# Altium PCB PCB1.PcbDoc (part 1 of 2)
Units mil, origin at the board's own origin, x right, y up, seen from the top; angles counter-clockwise.
Board outline 2521.04 x 1050 mil, 4 copper layers (Layer 1, Layer 2, Layer 3, Layer 4), stack 61.583 mil thick; 66 components, 75 nets, 299 pads, 167 vias.
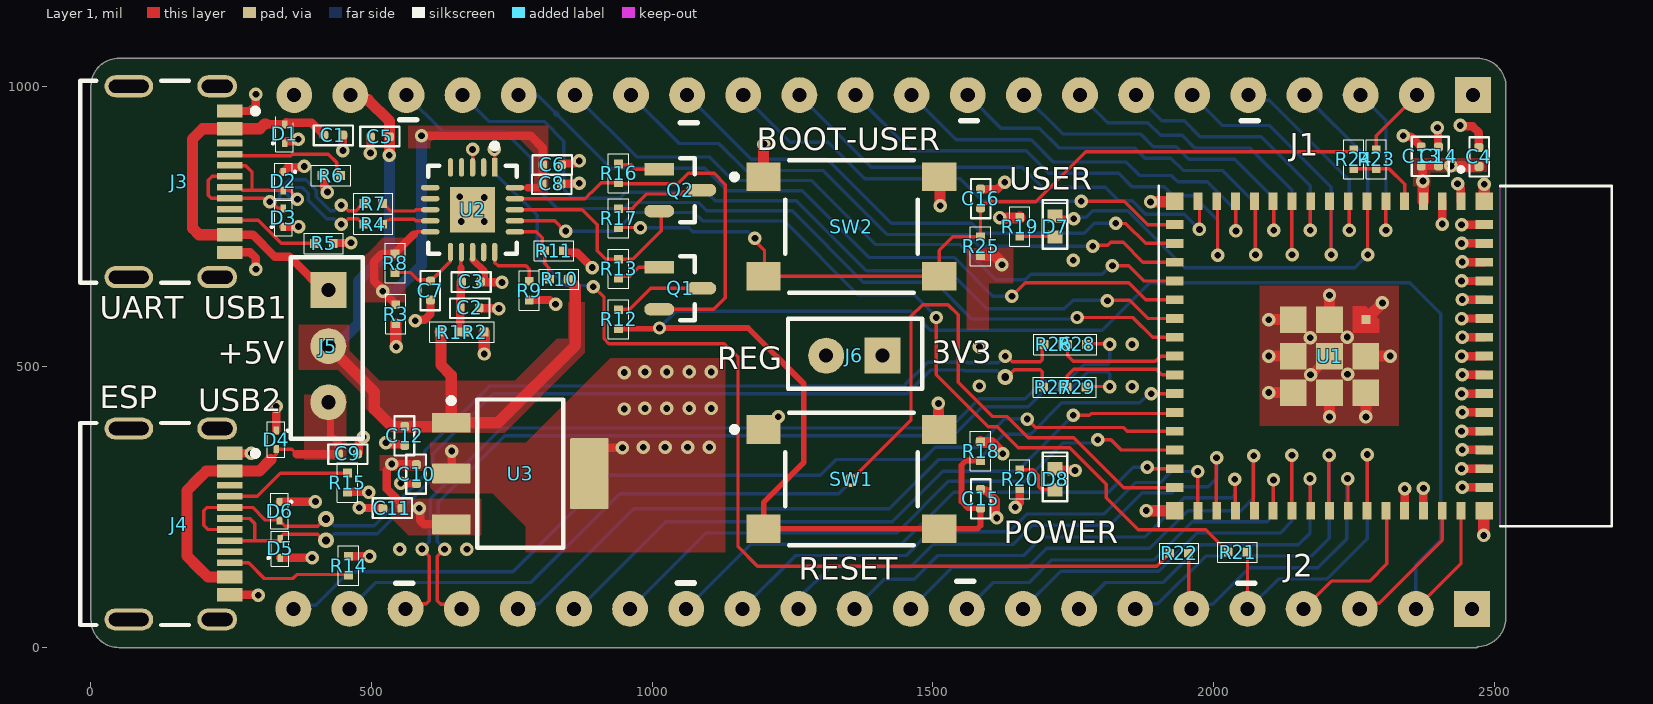
[diagram p0: Layer 1 view]
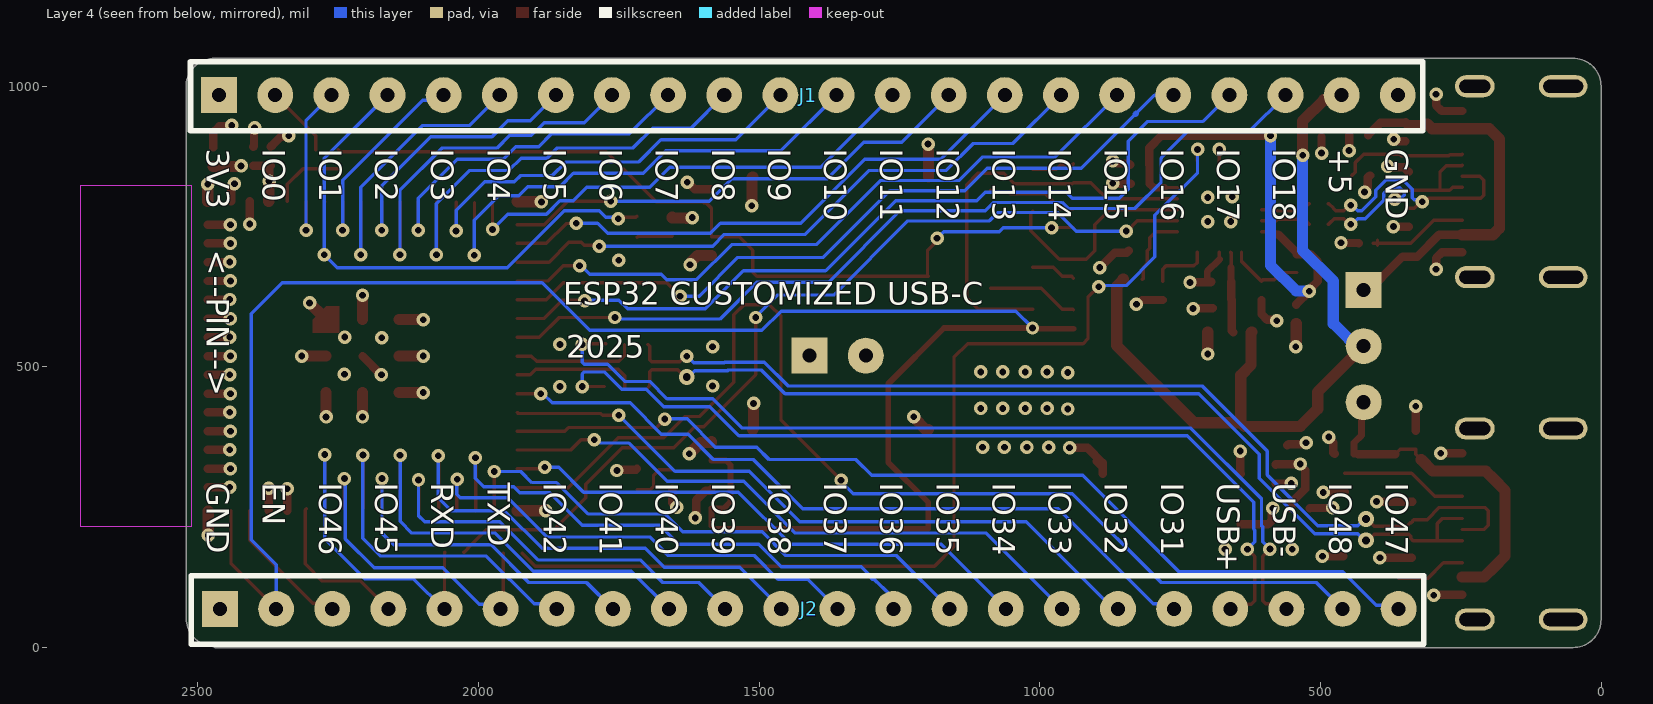
[diagram p1: Layer 4 view, seen from below]
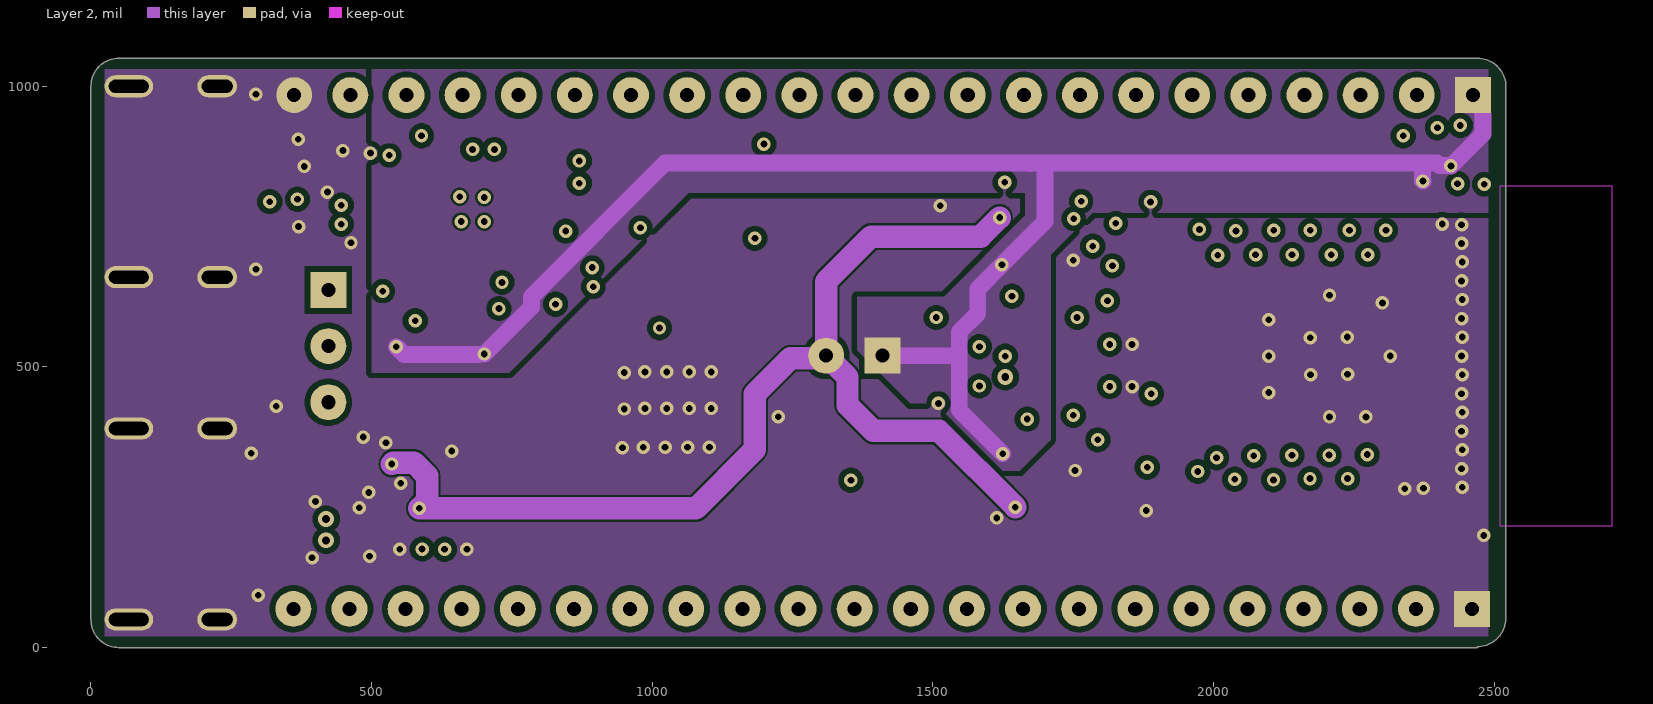
[diagram p2: Layer 2]
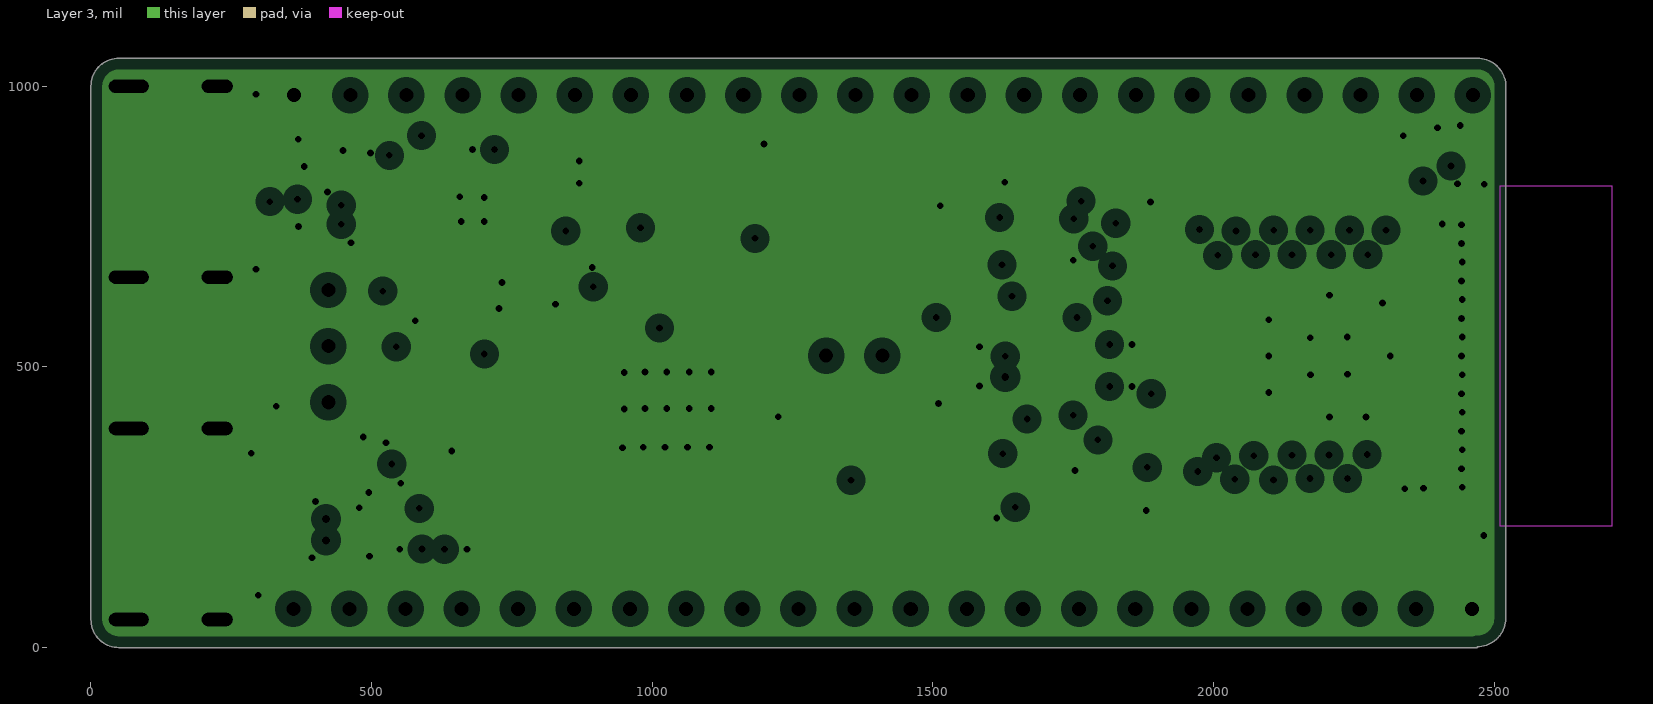
[diagram p3: Layer 3, clearances drawn from the general rule]

## Layer stack, top to bottom
Top Solder: solder mask 0.4, Solder Resist, Dk 3.5
Layer 1: signal copper 1.378
Dielectric 2: prepreg 3.9134, PP-006, Dk 4.1
Layer 2: signal copper 0.5984
Dielectric 1: dielectric 49.8031, FR-4, Dk 4.8
Layer 3: plane copper 0.5984, net GND
Dielectric 3: prepreg 3.9134, PP-006, Dk 4.1
Layer 4: signal copper 1.378
Bottom Solder: solder mask 0.4, Solder Resist, Dk 3.5

## Board outline
50,0 cw(c50,50) 0,50 0,1000 cw(c50,1000) 50,1050 2470.1,1050 cw(c2470.1,999.06) 2521.04,999.06 2521.04,52.18 2520.55,52.18 cw(c2469.61,52.18) 2469.61,1.24 2469.61,0

## Design rules (kind name [scope] priority, off if disabled: settings)
Clearance SMALLER [WithinRoom('FTDI') or WithinRoom('USBC1') or WithinRoom('USBC2')] p1: gap=4 ignorepadtopadclearanceinfootprint=FALSE
Clearance [All] p2: gap=10 ignorepadtopadclearanceinfootprint=FALSE except(0: Text-Text; 4: Track-Poly SMDPad-Poly; 5: Arc-Via Track-Via; 6: SMDPad-SMDPad; 8: Arc-Arc Arc-Track Track-Track)
ComponentClearance R27-R29 [InComponent('R29') vs InComponent('R27')] p1: gap=0 collisioncheckmode=3 verticalgap=0 showdistances=FALSE
ComponentClearance R26-R28 [InComponent('R28') vs InComponent('R26')] p2: gap=0 collisioncheckmode=3 verticalgap=0 showdistances=FALSE
ComponentClearance R1-R2 [InComponent('R1') vs InComponent('R2')] p3: gap=0 collisioncheckmode=3 verticalgap=0 showdistances=FALSE
ComponentClearance ComponentClearance_1 [All] p4: gap=10 collisioncheckmode=3 verticalgap=10 showdistances=FALSE
DiffPairsRouting DIFF90 [InDifferentialPairClass('DIFF90')] p1: maxlimit=8.1 minlimit=8 mostfreqgap=8 toplayer_minwidth=6.03 toplayer_maxwidth=6.23 toplayer_prefwidth=6.03 midlayer1_minwidth=5.11 midlayer1_maxwidth=5.31 midlayer1_prefwidth=5.11 bottomlayer_minwidth=6.03 bottomlayer_maxwidth=6.23 bottomlayer_prefwidth=6.03 maxuncoupledlength=500
DiffPairsRouting [All] p2: maxlimit=10 minlimit=10 mostfreqgap=10 toplayer_minwidth=15 toplayer_maxwidth=15 toplayer_prefwidth=15 midlayer1_minwidth=15 midlayer1_maxwidth=15 midlayer1_prefwidth=15 bottomlayer_minwidth=15 bottomlayer_maxwidth=15 bottomlayer_prefwidth=15 maxuncoupledlength=500
MinimumSolderMaskSliver [All] p1: minsoldermaskwidth=4
PlaneClearance [All] p1: clearance=20
PlaneConnect [All] p1: pad.planeconnectstyle=Relief pad.reliefexpansion=20 pad.reliefentries=4 pad.reliefconductorwidth=20 pad.reliefairgap=10 via.planeconnectstyle=Direct via.reliefexpansion=20 via.reliefentries=4 via.reliefconductorwidth=10 via.reliefairgap=10
PolygonConnect [All] p1: connectstyle=Direct reliefconductorwidth=10 reliefentries=4 polygonreliefangle="90 Angle" airgapwidth=10
RoomDefinition RANDOM [False vs False] p1: confinementstyle=ConfineIn formatcopy=TRUE lockcomponents=FALSE outline 546,815 465,815 465,735 546,735
RoomDefinition FTDI [False vs False] p2: confinementstyle=ConfineIn formatcopy=TRUE lockcomponents=FALSE outline 575,885 778.07,885 778.07,677.07 575,677.07
RoomDefinition USBC1 [False vs False] p3: confinementstyle=ConfineIn formatcopy=TRUE lockcomponents=FALSE outline 146,1026 312,1026 312,635 146,635
RoomDefinition USBC2 [False vs False] p4: confinementstyle=ConfineIn formatcopy=TRUE lockcomponents=FALSE outline 154.36,416.24 320.36,416.24 320.36,25.24 154.36,25.24
RoutingVias [All] p1: holewidth=14 width=28 viastyle="Through Hole" minholewidth=6 minwidth=10 maxholewidth=28 maxwidth=50
SilkToSolderMaskClearance [IsPad] p1: minsilkscreentomaskgap=6 clearancetoexposedcopper=TRUE
SolderMaskExpansion [All] p1: expansion=4 istentingtop=FALSE
SupplyNets "Schematic Supply Nets_5" [InNet('+3V3')] p1: voltage=0.000
SupplyNets "Schematic Supply Nets_4" [InNet('+3V3_REG')] p2: voltage=0.000
SupplyNets "Schematic Supply Nets_3" [InNet('+5V BUS2')] p3: voltage=0.000
SupplyNets "Schematic Supply Nets_2" [InNet('GND')] p4: voltage=0.000
SupplyNets "Schematic Supply Nets_1" [InNet('+5V')] p5: voltage=0.000
SupplyNets "Schematic Supply Nets" [InNet('+5V BUS1')] p6: voltage=0.000
UnRoutedNet [WithinRoom('RANDOM')] p1:
Width [All] p1: maxlimit=100 minlimit=6 preferedwidth=10 midlayer1_minwidth=10 minimp=50.000000 maximp=50.000000 favimp=50.000000
23 further rules are at their usual default settings.

## Classes and differential pairs
differential pair class DIFF90: CON1_USB CON2_USB CON_ESP_USB ESP_USB FTDI1_USB
differential pair FTDI1_USB: +FTDI1_USB_P -FTDI1_USB_N
differential pair ESP_USB: +ESP_USB_P -ESP_USB_N
differential pair CON_ESP_USB: +CON_ESP_USB_P -CON_ESP_USB_N
differential pair CON2_USB: +CON2_USB_P -CON2_USB_N
differential pair CON1_USB: +CON1_USB_P -CON1_USB_N

## Components (designator, comment, footprint, x,y, rotation, side; value= is the part's Value field where it differs from the comment)
C1 "0.1uF, 50V" FP-CL599-IPC_B 432,913 r180 top value=100nF
C2 "0.1uF, 50V" FP-CL599-IPC_B 675,605 r180 top value=100nF
C3 "4u7F" FP-CL599-IPC_B 677.42,651.53 r180 top value=4.7uF
C4 "0.1uF, 50V" FP-CL599-IPC_B 2473,874 r270 top value=100nF
C5 "0.1uF, 50V" FP-CL599-IPC_B 515,910 r0 top value=100nF
C6 "0.1uF, 50V" FP-CL599-IPC_B 822,860 r180 top value=100nF
C7 "0.1uF, 50V" FP-CL599-IPC_B 605,636 r90 top value=100nF
C8 "0.1uF, 50V" FP-CL599-IPC_B 821,826 r180 top value=100nF
C9 "0.1uF, 50V" FP-CL599-IPC_B 458,345 r180 top value=100nF
C10 "10uF, 10V" FP-CL599-IPC_B 580,309 r90 top value=10uF
C11 "10uF, 10V" FP-CL599-IPC_B 537,248 r0 top value=10uF
C12 "4u7F" FP-CL599-IPC_B 559,377 r90 top value=4.7uF
C13 "10uF, 10V" FP-CL599-IPC_B 2370.16,875 r270 top value=10uF
C14 "0.1uF, 50V" FP-CL599-IPC_B 2401,875 r270 top value=100nF
C15 "1uF, 16V" FP-CL599-IPC_B 1585,265 r270 top value=1uF
C16 "0.1uF, 50V" FP-CL599-IPC_B 1585,800 r270 top value=100nF
D1 "ESD9B5.0ST5G" ONSC-SOD-923-2-514AB-01_V 345,915 r90 top value=15pF
D2 "ESD9B5.0ST5G" ONSC-SOD-923-2-514AB-01_V 343,831 r270 top value=15pF
D3 "ESD9B5.0ST5G" ONSC-SOD-923-2-514AB-01_V 343,766 r90 top value=15pF
D4 "ESD9B5.0ST5G" ONSC-SOD-923-2-514AB-01_V 330,370 r270 top value=15pF
D5 "ESD9B5.0ST5G" ONSC-SOD-923-2-514AB-01_V 337,176.46 r90 top value=15pF
D6 "ESD9B5.0ST5G" ONSC-SOD-923-2-514AB-01_V 336,243 r270 top value=15pF
D7 "RED" LED-RED-0402 1717.67,750 r90 top
D8 "GREEN" LED-GREEN-0402 1717.67,300 r90 top
J1 "TS-122-G-A" HDR_1X22_2.54MM 2462.2,984.25 r90 bottom locked
J2 "TS-122-G-A" HDR_1X22_2.54MM 2460.63,68.9 r90 bottom locked
J3 "USB-C" FP-2171790001-MFG 112.8,829.92 r270 top locked
J4 "USB-C" FP-2171790001-MFG 112.8,220.08 r270 top locked
J5 "TS-103-T-A" HDR_1X3_2.54MM -312,179 r0 top locked
J6 "TS-102-T-A" HDR_1X2_2.54MM -676,-21721 r270 top locked
Q1 "SS8050-G" FP-SS8050-G-IPC_B 1050,640 r0 top
Q2 "SS8050-G" FP-SS8050-G-IPC_B 1050,815 r0 top
R1 "0R" RESC1005X40X25NL05T10 638.73,562 r0 top
R2 "0R" RESC1005X40X25NL05T10 684,562 r180 top
R3 "0R" RESC1005X40X25NL05T10 543,594 r90 top
R4 "27R" RESC1005X40X25NL05T10 503,754 r0 top
R5 "5k1R" RESC1005X40X25NL05T10 415,720 r180 top value=5.1kR
R6 "5k1R" RESC1005X40X25NL05T10 428,841 r0 top value=5.1kR
R7 "27R" RESC1005X40X25NL05T10 503,791 r0 top
R8 "0R" RESC1005X40X25NL05T10 542,685 r270 top
R9 "10k, (1%)" RESC1005X40X25NL05T10 781,636 r270 top value=10kR
R10 "4k7R" RESC1005X40X25NL05T10 834,656 r0 top value=4.7kR
R11 "10k, (1%)" RESC1005X40X25NL05T10 825,707 r180 top value=10kR
R12 "0R" RESC1005X40X25NL05T10 940,585 r270 top
R13 "10k, (1%)" RESC1005X40X25NL05T10 940,675 r270 top value=10kR
R14 "5k1R" RESC1005X40X25NL05T10 459,146 r270 top value=5.1kR
R15 "5k1R" RESC1005X40X25NL05T10 457,294 r90 top value=5.1kR
R16 "10k, (1%)" RESC1005X40X25NL05T10 940,845 r90 top value=10kR
R17 "0R" RESC1005X40X25NL05T10 940,765 r270 top
R18 "10k, (1%)" RESC1005X40X25NL05T10 1585,350 r90 top value=10kR
R19 "1kR" RESC1005X40X25NL05T10 1655,750 r90 top
R20 "1kR" RESC1005X40X25NL05T10 1655,300 r270 top
R21 "0R" RESC1005X40X25NL05T10 2043,170 r180 top
R22 "0R" RESC1005X40X25NL05T10 1939,168 r180 top
R23 "27R" RESC1005X40X25NL05T10 2290,870 r270 top
R24 "27R" RESC1005X40X25NL05T10 2250,870 r270 top
R25 "10k, (1%)" RESC1005X40X25NL05T10 1585,715 r270 top value=10kR
R26 "0R" RESC1005X40X25NL05T10 1715,540 r0 top
R27 "0R" RESC1005X40X25NL05T10 1714,464 r0 top
R28 "0R" RESC1005X40X25NL05T10 1756.73,540 r180 top
R29 "0R" RESC1005X40X25NL05T10 1756.2,464 r180 top
SW1 "Push  button SPST" FP-PTS645SH50SMTR92LFS-MFG 1355,300 r0 top locked
SW2 "Push  button SPST" FP-PTS645SH50SMTR92LFS-MFG 1355,750 r0 top locked
U1 "ESP32-S3-MINI-1-N8" XCVR_ESP32-S3-MINI-1-N8 2206.73,519.26 r270 top locked
U2 "USB to UART Bridge" FP-QFN-20-IPC_B 680,780 r270 top locked
U3 "LDO 3V3" DCY0004A_N 765,310 r0 top locked

## Footprints (in the part's own frame and the unit in brackets; to place one, negate y for a bottom-side part, rotate by r counter-clockwise, add the part's x,y. Pads: shape width x height; smd on the part's side, far side on the other; paste and mask are expansions set on the pad)
DCY0004A_N [mm] "SOT223, 4-Leads, Body 6.7x3.7mm, Pitch 2.3mm, IPC Medium Density"
  rrect11% 1.75x0.9 smd: 1(-3.125,2.3) 2(-3.125,0) 3(-3.125,-2.3)
  rrect6% 1.75x3.2 smd: 4(3.125,0)
  silkscreen extent -3.25,-3.35 1.95,3.42, body extent -3.5,-3.25 3.5,3.25, height 1.62
FP-2171790001-MFG [mm]
  rect 0.6x1.15 smd paste+0 mask+0: A1B12(-3.2,3.425) A4B9(-2.4,3.425) B1A12(3.2,3.425) B4A9(2.4,3.425)
  rect 0.3x1.15 smd paste+0 mask+0: A5(-1.25,3.425) A6(-0.25,3.425) A7(0.25,3.425) A8(1.25,3.425) B5(1.75,3.425) B6(0.75,3.425) B7(-0.75,3.425) B8(-1.75,3.425)
  rrect100% 1x1.8 hole 1.4 slot 0.6 at 0 deg paste-2539.97 mask+0: S1(-4.32,2.85) S2(4.32,2.85)
  rrect100% 1x2.2 hole 1.8 slot 0.6 at 0 deg paste-2539.97 mask+0: S3(-4.32,-1.15) S4(4.32,-1.15)
  silkscreen extent -4.57,-3.35 4.57,4.7, body extent -4.92,-3.45 4.92,4.1, height 0.25
FP-CL599-IPC_B [mil]
  rrect50% 15.69x15.69 smd paste+0 mask+0: 1(-16.87,0) 2(16.87,0)
  silkscreen extent -35,-17 35,18, body extent -35,-17 35,17, height 10
FP-PTS645SH50SMTR92LFS-MFG [mm]
  rect 1.55x1.3 smd paste+0 mask+0: 1(-3.975,2.25) 2(3.975,2.25) 3(-3.975,-2.25) 4(3.975,-2.25)
  silkscreen extent -5.42,-3 3,3, body extent -4.5,-3 4.5,3, height 4.3
FP-QFN-20-IPC_B [mm]
  rect 0.84x0.242 smd paste+0 mask+0: 1(-1.916,1)
  rrect100% 0.84x0.242 smd paste+0 mask+0: 2(-1.916,0.5) 3(-1.916,0) 4(-1.916,-0.5) 5(-1.916,-1) 11(1.916,-1) 12(1.916,-0.5) 13(1.916,0) 14(1.916,0.5) 15(1.916,1)
  rrect100% 0.242x0.84 smd paste+0 mask+0: 6(-1,-1.916) 7(-0.5,-1.916) 8(0,-1.916) 9(0.5,-1.916) 10(1,-1.916) 16(1,1.916) 17(0.5,1.916) 18(0,1.916) 19(-0.5,1.916) 20(-1,1.916)
  rect 2.05x2.05 smd paste-1000 mask+0: 21(0,0)
  silkscreen extent -3.01,-2 2,2, body extent -2.59,-2.59 2.59,2.59, height 0.25
FP-SS8050-G-IPC_B [mm]
  rect 1.357x0.572 smd paste+0 mask+0: 1(-0.951,0.95)
  rrect100% 1.357x0.572 smd paste+0 mask+0: 2(-0.951,-0.95) 3(0.951,0)
  silkscreen extent 0,-1.45 0.65,1.45, body extent -1.88,-1.7 1.88,1.7, height 0.25
HDR_1X2_2.54MM [mil]
  rect 64x64 hole 25: 1(-22241,2086)
  round 64 hole 25: 2(-22241,1986)
  silkscreen extent -22307,1918 -22182,2157, body extent -22292,1933 -22192,2141, height 326
HDR_1X3_2.54MM [mil]
  rect 64x64 hole 25: 1(735,458)
  round 64 hole 25: 2(735,358) 3(735,258)
  silkscreen extent 668,193 796,516, body extent 685,204 785,512, height 326
HDR_1X22_2.54MM [mil]
  rect 64x64 hole 25: 1(0,0)
  round 64 hole 25: 2(0,-100) 3(0,-200) 4(0,-300) 5(0,-400) 6(0,-500) 7(0,-600) 8(0,-700) 9(0,-800) 10(0,-900) 11(0,-1000) 12(0,-1100) 13(0,-1200) 14(0,-1300) 15(0,-1400) 16(0,-1500) 17(0,-1600) 18(0,-1700) 19(0,-1800) 20(0,-1900) 21(0,-2000) 22(0,-2100)
  silkscreen extent -63,-2145 59,51, body extent -51,-2151 49,57, height 326
LED-GREEN-0402 [mm]
  rect 0.6x0.7 smd: 1(-0.475,0) 2(0.475,0)
  silkscreen extent -1,-0.56 1.2,0.56, body extent -0.5,-0.3 0.5,0.3, height 0.2
LED-RED-0402 [mm]
  rect 0.6x0.7 smd: 1(-0.475,0) 2(0.475,0)
  silkscreen extent -1,-0.56 1.2,0.56, body extent -0.5,-0.3 0.5,0.3, height 0.2
ONSC-SOD-923-2-514AB-01_V [mm] "SOD, 2-Leads, Body 0.8x0.6mm"
  rect 0.36x0.25 smd: 1(-0.42,0) 2(0.42,0)
  silkscreen extent -0.81,-0.4 0.79,0.57, body extent -0.4,-0.3 0.4,0.3, height 0.4
RESC1005X40X25NL05T10 [mm] "Chip Resistor, 2-Leads, Body 1.00x0.50mm, IPC Medium Density"
  rect 0.397x0.398 smd mask+0.05: 1(-0.425,0) 2(0.425,0)
  silkscreen extent -0.89,-0.46 0.89,0.46, body extent -0.53,-0.27 0.53,0.28, height 0.4
XCVR_ESP32-S3-MINI-1-N8 [mm]
  rect 0.8x0.4 smd: 1(-7,5.95) 2(-7,5.1) 3(-7,4.25) 4(-7,3.4) 5(-7,2.55) 6(-7,1.7) 7(-7,0.85) 8(-7,0) 9(-7,-0.85) 10(-7,-1.7) 11(-7,-2.55) 12(-7,-3.4) 13(-7,-4.25) 14(-7,-5.1) 15(-7,-5.95) 31(7,-5.95) 32(7,-5.1) 33(7,-4.25) 34(7,-3.4) 35(7,-2.55) 36(7,-1.7) 37(7,-0.85) 38(7,0) 39(7,0.85) 40(7,1.7) 41(7,2.55) 42(7,3.4) 43(7,4.25) 44(7,5.1) 45(7,5.95)
  rect 0.4x0.8 smd: 16(-5.95,-7) 17(-5.1,-7) 18(-4.25,-7) 19(-3.4,-7) 20(-2.55,-7) 21(-1.7,-7) 22(-0.85,-7) 23(0,-7) 24(0.85,-7) 25(1.7,-7) 26(2.55,-7) 27(3.4,-7) 28(4.25,-7) 29(5.1,-7) 30(5.95,-7) 46(5.95,7) 47(5.1,7) 48(4.25,7) 49(3.4,7) 50(2.55,7) 51(1.7,7) 52(0.85,7) 53(0,7) 54(-0.85,7) 55(-1.7,7) 56(-2.55,7) 57(-3.4,7) 58(-4.25,7) 59(-5.1,7) 60(-5.95,7)
  rect 1.2x1.2 smd: 61(0,0) 67(0,1.65) 68(1.65,1.65) 69(-1.65,0) 70(1.65,0) 71(-1.65,-1.65) 72(0,-1.65) 73(1.65,-1.65)
  rect 0.8x0.8 smd: 62(-7,7) 63(-7,-7) 64(7,-7) 65(7,7)
  rect 0.4x0.4 smd paste-1 mask+0: 66(-1.65,1.65)
  Layer 1 region: -1.05,1.05 -2.25,1.05 -2.25,1.65 -1.65,2.25 -1.05,2.25
  Keep-Out Layer region: 7.7,7.725 -7.7,7.725 -7.7,12.775 7.7,12.775
  Keep-Out Layer region: 7.7,7.725 -7.7,7.725 -7.7,12.775 7.7,12.775
  silkscreen extent -8.55,-7.73 7.7,12.78, body extent -7.7,-7.73 7.7,12.78, height 2.55

## Part data
C1 C2 C4 C5 C6 C7 C8 C9 C14 C16: library part CL05B104KB54PNC, "50V 100nF X7R ±10% 0402 Multilayer Ceramic Capacitors MLCC - SMD/SMT ROHS", Case/Package=343Case, LCSC part number=C307331, Manufacturer=Samsung, Max Operating Temperature=125°C, Min Operating Temperature=-55°C, Supplier Part Number=1276-CL05B104KB54PNCCT-ND, Tolerance=10%, Voltage Rating=50V, Category="Ceramic Capacitors", Height=550um, Manufacturer Part Number=CL05B104KB54PNC, Material=4241ConductorMaterial, Pricing="1=0.1, 10=0.03, 100=0.018, 1000=0.01195, 2500=0.01037, 5000=0.00939 (USD)", RoHS=Yes, RoHS Compliant=Yes, Stock=1445745, Supplier=Digikey
C3 C12: library part CL05A475MP5NRNC, "Multilayer Ceramic Capacitor, 4.7 uF, 10 V, ï¿½ 20%, X5R, 0402 [1005 Metric]", Case Code (Imperial)=0402, Case Code (Metric)=1005, Dielectric=X5R, LCSC part number=C23733, Manufacturer=Samsung, Max Operating Temperature=85°C, Min Operating Temperature=-55°C, Supplier Part Number=1276-1482-1-ND, Tolerance=20%, Voltage Rating=10V, Case/Package=0402, Category="Ceramic Capacitors", ComponentLink1Description=https://datasheet.ciiva.com/25786/cl05a475mp5nrnc-25786963.pdf?src-supplier=Digikey, ComponentLink1URL=https://datasheet.ciiva.com/25786/cl05a475mp5nrnc-25786963.pdf?src-supplier=Digikey, ComponentLink2Description=https://datasheet.ciiva.com/16437/cl05b104kq5nnnc-16437353.pdf?src-supplier=Future+Electronics, ComponentLink2URL=https://datasheet.ciiva.com/16437/cl05b104kq5nnnc-16437353.pdf?src-supplier=Future+Electronics, Height=550um, Lead Free="Lead Free", Manufacturer Part Number=CL05A475MP5NRNC, Material=4241ConductorMaterial, Mounting Technology="Surface Mount", Packaging="Cut Tape", Pricing="1=0.1, 10=0.04, 100=0.0245, 1000=0.01648, 2500=0.01439, 5000=0.01308 (USD)", RoHS=Yes, RoHS Compliant=Yes, Series=CL, Stock=1513638, Supplier=Digikey
C10 C11 C13: library part CL05A106MP8NUB8, "Multilayer Ceramic Capacitor, 10 uF, 10 V, ± 20%, X5R, 0402 [1005 Metric]", Case Code (Imperial)=0402, Case Code (Metric)=1005, Manufacturer=Samsung, Max Operating Temperature=85°C, Min Operating Temperature=-55°C, Supplier Part Number=1276-6830-1-ND, Tolerance=20%, Voltage Rating=10V, Case/Package=0402, Category="Ceramic Capacitors", ComponentLink1Description=http://www.samsungsem.com/kr/support/product-search/mlcc/CL05A106MP8NUB8.jsp?src-supplier=Digikey, ComponentLink1URL=http://www.samsungsem.com/kr/support/product-search/mlcc/CL05A106MP8NUB8.jsp?src-supplier=Digikey, ComponentLink2Description=https://datasheet.octopart.com/CL05A106MP8NUB8-Samsung-Electro-Mechanics-datasheet-136460857.pdf?src-supplier=Future+Electronics, ComponentLink2URL=https://datasheet.octopart.com/CL05A106MP8NUB8-Samsung-Electro-Mechanics-datasheet-136460857.pdf?src-supplier=Future+Electronics, Height=550um, LCSC part number=CL05A106MP8NUB8, Length=0.039inch, Manufacturer Part Number=CL05A106MP8NUB8, Material=4241ConductorMaterial, Mounting Technology="Surface Mount", Packaging="Cut Tape", Pricing="1=0.31, 10=0.188, 100=0.1251, 1000=0.09037, 2500=0.08106 (USD)", RoHS=Yes, RoHS Compliant=Yes, Series=CL, Stock=179131, Supplier=Digikey, Thickness=0.035inch, Width=0.02inch
C15: library part CL05A105KO5NNNC, "16V 1uF X5R ±10% 0402 Multilayer Ceramic Capacitors MLCC - SMD/SMT ROHS", Case Code (Imperial)=0402, Case Code (Metric)=1005, Dielectric=X5R, LCSC part number=C29266, Manufacturer=Samsung, Max Operating Temperature=85°C, Min Operating Temperature=-55°C, Package Quantity=1, Supplier Part Number=1276-1067-1-ND, Tolerance=10%, Voltage=16V, Case/Package=0402, Category="Ceramic Capacitors", ComponentLink1Description=https://datasheet.ciiva.com/16207/cl05a105ko5nnnc-16207571.pdf?src-supplier=Future+Electronics, ComponentLink1URL=https://datasheet.ciiva.com/16207/cl05a105ko5nnnc-16207571.pdf?src-supplier=Future+Electronics, ComponentLink2Description=https://datasheet.ciiva.com/15195/getdatasheetpartid-355272-15195629.pdf?src-supplier=Verical, ComponentLink2URL=https://datasheet.ciiva.com/15195/getdatasheetpartid-355272-15195629.pdf?src-supplier=Verical, Construction=Flat, Depth=0.5mm, Height=0.5mm, Length=1mm, Manufacturer Part Number=CL05A105KO5NNNC, Material=4241ConductorMaterial, Mounting Technology="Surface Mount", Packaging="Tape and Reel", Pricing="1=0.1, 10=0.027, 100=0.0163, 1000=0.01076, 2500=0.00932, 5000=0.00843 (USD)", Radiation Hardening=No, RoHS=Yes, RoHS Compliant=Yes, Series=CL, Stock=1549627, Supplier=Digikey, Thickness=0.022inch, Voltage Rating=16V, Voltage Rating (DC)=16V, Width=0.02inch
D1 D2 D3 D4 D5 D6: "ESD Suppressor TVS Single Bi-Dir ±18kV@Air Gap/±18kV@Contact Disc 2-Pin SOD-923 T/R", Breakdown Voltage=5.8V, Case/Package=SOD-923-2, Clamping Voltage=12.5V, LCSC part number=C316040, Leakage Current=1uA, Manufacturer="ON Semiconductor", Max Breakdown Voltage=7.8V, Max Operating Temperature=150°C, Max Power Dissipation=300mW, Max Surge Current=1A, Min Operating Temperature=-55°C, Operating Supply Voltage=5V, Package Quantity=1, Power Line Protection=No, Supplier Part Number=ESD9B5.0ST5GOSCT-ND, Test Current=1mA, Category="ESD and Circuit Protection ICs", Clamping Voltage-Max=12.5V, ComponentLink1Description=https://datasheet.ciiva.com/1219/1596367-1219274.pdf?src-supplier=Newark, ComponentLink1URL=https://datasheet.ciiva.com/1219/1596367-1219274.pdf?src-supplier=Newark, Depth=0.6mm, Diode Type=ZENER, Direction=Bidirectional, ESD Protection=Yes, Halogen Free="Halogen Free", Height=0.4mm, Lead Free="Lead Free", Length=0.8mm, Manufacturer Part Number=ESD9B5.0ST5G, Max Reverse Leakage Current=1uA, Min Breakdown Voltage=5.8V, Number of Bidirectional Channels=1, Number of Channels=1, Number of Elements=1, Number of Lines=1, Packaging="Tape and Reel", Peak Pulse Current=1A, Peak Pulse Power=300mW, Pins=2, Polarity=Bidirectional, Pricing="1=0.1, 10=0.071, 100=0.033, 500=0.031, 1000=0.029 (USD)", Radiation Hardening=No, Reach SVHC Compliant=No, Reverse Breakdown Voltage=5.8V, Reverse Standoff Voltage=5V, RoHS=Yes, RoHS Compliant=Yes, Series="Automotive, AEC-Q101", Stock=1217500, Supplier=Digikey, Termination=SMD/SMT, Width=0.65mm, Working Voltage=5V
D7: library part VLMS1500-GS08, "LED RED 0402 SMD", Case Code (Imperial)=0402, Case Code (Metric)=1005, Color=Red, Forward Current=30mA, Forward Voltage=2V, LCSC part number=C511370, Manufacturer=Vishay, Max Operating Temperature=85°C, Min Operating Temperature=-30°C, Package Quantity=9000, Power Rating=75mW, Supplier Part Number=VLMS1500-GS08CT-ND, Test Current=20mA, Case/Package=0402, Category=LEDs, ComponentLink1Description=http://components.arrow.com/part/dataview/56357384S461524N5680?src-supplier=Arrow+Electronics, ComponentLink1URL=http://components.arrow.com/part/dataview/56357384S461524N5680?src-supplier=Arrow+Electronics, ComponentLink2Description=http://www.mouser.com/ds/2/427/vlmo1500-244705.pdf?src-supplier=Mouser, ComponentLink2URL=http://www.mouser.com/ds/2/427/vlmo1500-244705.pdf?src-supplier=Mouser, ComponentLink3Description=http://www.farnell.com/datasheets/1809983.pdf?src-supplier=Farnell, ComponentLink3URL=http://www.farnell.com/datasheets/1809983.pdf?src-supplier=Farnell, ComponentLink4Description=http://www.alliedelec.com/m/d/cfc385e1097fc985ee9a50a3551ac188.pdf?src-supplier=Allied+Electronics, ComponentLink4URL=http://www.alliedelec.com/m/d/cfc385e1097fc985ee9a50a3551ac188.pdf?src-supplier=Allied+Electronics, ComponentLink5Description=https://datasheet.octopart.com/VLMS1500-GS08-Vishay-datasheet-62332426.pdf?src-supplier=Newark, ComponentLink5URL=https://datasheet.octopart.com/VLMS1500-GS08-Vishay-datasheet-62332426.pdf?src-supplier=Newark, ComponentLink6Description=http://www.vishay.com/docs/82554/vlmo1500.pdf?src-supplier=Avnet, ComponentLink6URL=http://www.vishay.com/docs/82554/vlmo1500.pdf?src-supplier=Avnet, ComponentLink7Description=https://datasheet.octopart.com/VLMS1500-GS08-Vishay-datasheet-21227148.pdf?src-supplier=Future+Electronics, ComponentLink7URL=https://datasheet.octopart.com/VLMS1500-GS08-Vishay-datasheet-21227148.pdf?src-supplier=Future+Electronics, ComponentLink8Description=http://www.farnell.com/datasheets/2050839.pdf?src-supplier=Newark, ComponentLink8URL=http://www.farnell.com/datasheets/2050839.pdf?src-supplier=Newark, ComponentLink9Description=http://www.farnell.com/datasheets/1809983.pdf?src-supplier=Element14, ComponentLink9URL=http://www.farnell.com/datasheets/1809983.pdf?src-supplier=Element14, ComponentLink10Description=https://datasheet.octopart.com/VLMS1500-GS08-Vishay-datasheet-33014519.pdf?src-supplier=Element14, ComponentLink10URL=https://datasheet.octopart.com/VLMS1500-GS08-Vishay-datasheet-33014519.pdf?src-supplier=Element14, ComponentLink11Description=http://www.farnell.com/datasheets/1809983.pdf?src-supplier=Newark, ComponentLink11URL=http://www.farnell.com/datasheets/1809983.pdf?src-supplier=Newark, ComponentLink12Description=http://datasheet.octopart.com/VLMS1500-GS08-Vishay-datasheet-21227148.pdf?src-supplier=Avnet, ComponentLink12URL=http://datasheet.octopart.com/VLMS1500-GS08-Vishay-datasheet-21227148.pdf?src-supplier=Avnet, ComponentLink13Description=http://datasheet.octopart.com/VLMS1500-GS08-Vishay-datasheet-21227148.pdf?src-supplier=LCSC, ComponentLink13URL=http://datasheet.octopart.com/VLMS1500-GS08-Vishay-datasheet-21227148.pdf?src-supplier=LCSC, ComponentLink14Description=http://datasheet.octopart.com/VLMS1500-GS08-Vishay-datasheet-21227148.pdf?src-supplier=Quest, ComponentLink14URL=http://datasheet.octopart.com/VLMS1500-GS08-Vishay-datasheet-21227148.pdf?src-supplier=Quest, ComponentLink15Description=http://datasheet.octopart.com/VLMS1500-GS08-Vishay-datasheet-21227148.pdf?src-supplier=NAC+Semi, ComponentLink15URL=http://datasheet.octopart.com/VLMS1500-GS08-Vishay-datasheet-21227148.pdf?src-supplier=NAC+Semi, Dominant Wavelength=631nm, Height=0.55mm, Illumination Color=Red, Lead Free="Lead Free", Length=1mm, Lens Size=0.5mm, Lens Style=Flat,Rectangular,Square, Luminous Intensity=54mcd, Manufacturer Part Number=VLMS1500-GS08, Mounting Technology="Surface Mount", Number of LEDs=1, Packaging="Tape and Reel", Pins=2, Pricing="1=0.33, 10=0.189, 100=0.1166, 500=0.08838, 1000=0.07977 (USD)", Radiation Hardening=No, Reach SVHC Compliant=Unknown, RoHS=Yes, RoHS Compliant=Yes, Series=CHipLED, Stock=72955, Supplier=Digikey, Viewing Angle=130°, Wavelength=631nm, Width=0.5mm
D8: library part VLMTG1500-GS08, "LED GREEN 0402 SMD", LCSC part number=C20346084, Manufacturer=Vishay, Supplier Part Number=751-VLMTG1500-GS08DKR-ND, Category=LEDs, Manufacturer Part Number=VLMTG1500-GS08, Pricing="1=0.43, 10=0.249, 100=0.1568, 500=0.12086, 1000=0.10985 (USD)", RoHS=Yes, RoHS Compliant=Yes, Stock=2572, Supplier=Digikey, Viewing Angle=65°
J1 J2: "22 Position Header Connector Post Gold", LCSC part number=C7125323, Manufacturer=Samtec, Supplier Part Number=200-TS122GA, Category=Connectors, ComponentLink1Description=https://datasheet.ciiva.com/410/tx-1xx-x-x-mkt1-410311.pdf?src-supplier=Digikey, ComponentLink1URL=https://datasheet.ciiva.com/410/tx-1xx-x-x-mkt1-410311.pdf?src-supplier=Digikey, Manufacturer Part Number=TS-122-G-A, Pricing="1=5.24, 10=5.24, 50=5.24, 100=4.19, 1000=3.03, 10000=2.45 (USD)", RoHS=Yes, Stock=20, Supplier=Mouser
J3 J4: library part 217179-0001, "CONN RCP USB2.0 TYP C 24P SMD RA", Current Rating=1.25A, LCSC part number=C2894899, Manufacturer=Molex, Max Operating Temperature=85°C, Min Operating Temperature=-40°C, Supplier Part Number=900-2171790001CT-ND, Voltage Rating=30V, Category=Connectors, Contact Material=Nickel,Gold, Gender=Receptacle, Height=3.36mm, Manufacturer Part Number=217179-0001, Number of Contacts=16, Pricing="1=0.79, 10=0.645, 25=0.5948, 50=0.5594, 100=0.5259, 250=0.48484, 500=0.45592 (USD)", RoHS=No, Stock=2736, Supplier=Digikey, USB Standard="USB 2.0"
J5: "CONN HEADER VERT 3POS 2.54MM", LCSC part number=C6338633, Manufacturer=Samtec, Supplier Part Number=SAM1112-03-ND, Category=Connectors, ComponentLink1Description=https://datasheet.ciiva.com/410/tx-1xx-x-x-mkt1-410199.pdf?src-supplier=Digikey, ComponentLink1URL=https://datasheet.ciiva.com/410/tx-1xx-x-x-mkt1-410199.pdf?src-supplier=Digikey, Manufacturer Part Number=TS-103-T-A, Pricing="1=0.9, 10=0.734, 100=0.5984, 500=0.51874, 1000=0.48782, 5000=0.42299, 10000=0.42149 (USD)", RoHS=Yes, Stock=9448, Supplier=Digikey
J6: "CONN HEADER VERT 2POS 2.54MM", LCSC part number=C3337950, Manufacturer=Samtec, Supplier Part Number=SAM1112-02-ND, Category="Headers and Wire Housings", ComponentLink1Description=https://datasheet.ciiva.com/410/tx-1xx-x-x-mkt1-410198.pdf?src-supplier=Digikey, ComponentLink1URL=https://datasheet.ciiva.com/410/tx-1xx-x-x-mkt1-410198.pdf?src-supplier=Digikey, Gender=29Gender, Lead Free=5697LeadFree, Manufacturer Part Number=TS-102-T-A, Pricing="1=0.71, 10=0.575, 100=0.4687, 500=0.4063, 1000=0.38208, 5000=0.3313, 10000=0.32266 (USD)", RoHS=Yes, Stock=6682, Supplier=Digikey, Width=2.54mm
Q1 Q2: "TRANS NPN 25V 1.5A SOT-23-3", Case/Package=TO-236-3, Collector Base Voltage (VCBO)=40V, Collector Emitter Breakdown Voltage=25V, Collector Emitter Saturation Voltage=500mV, Collector-emitter Voltage-Max=400mV, Emitter Base Voltage (VEBO)=5V, LCSC part number=C164886, Manufacturer=Comchip, Max Collector Current=1.5A, Max Operating Temperature=150°C, Max Power Dissipation=300mW, Supplier Part Number=641-1790-1-ND, Transition Frequency=100MHz, Category=Transistors, ComponentLink1Description="http://www.comchiptech.com/admin/files/product/SS8050-G RevA181526.pdf?src-supplier=Digikey", ComponentLink1URL="http://www.comchiptech.com/admin/files/product/SS8050-G RevA181526.pdf?src-supplier=Digikey", Height=1.15mm, hFE Min=200, Manufacturer Part Number=SS8050-G, Max Breakdown Voltage=25V, Mounting Technology="Surface Mount", Number of Elements=1, Packaging="Cut Tape", Power Dissipation=300mW, Pricing="1=0.24, 10=0.148, 100=0.0921, 500=0.06754, 1000=0.05958 (USD)", RoHS=Yes, RoHS Compliant=Yes, Series=-, Stock=104442, Supplier=Digikey
R1 R2 R3 R8 R12 R17 R21 R22 R26 R27 R28 R29: library part RC0402FR-070RL, "62.5mW Thick Film Resistors 50V ±5% 0Ω 0402 Chip Resistor - Surface Mount ROHS", Case Code (Imperial)=0402, Case Code (Metric)=1005, LCSC part number=C60485, Manufacturer=Yageo, Max Operating Temperature=155°C, Max Power Dissipation=63mW, Min Operating Temperature=-55°C, Power Rating=62.5mW, Supplier Part Number=311-0.0LRCT-ND, Temperature Coefficient=200ppm/°C, Tolerance=1%, Voltage Rating=50V, Case/Package=0402, Category="Chip SMD Resistors", Contact Plating=Tin,Matte, Features="Moisture Resistant", Height=0.35mm, Lead Free=5697LeadFree, Length=1mm, Manufacturer Part Number=RC0402FR-070RL, Mounting Technology="Surface Mount", Number of Terminations=2, Packaging="Tape and Reel", Pricing="1=0.1, 10=0.002 (USD)", RoHS=Yes, RoHS Compliant=Yes, Series=RC, Stock=1505938, Supplier=Digikey, Termination=SMD/SMT, Width=0.5mm
R4 R7 R23 R24: library part RC0402FR-0727RL, "62.5mW 27Ω 50V ±1% ±100ppm/℃ Thick Film Resistors 0402 Chip Resistor - Surface Mount ROHS", Case Code (Imperial)=0402, Case Code (Metric)=1005, LCSC part number=C138021, Manufacturer=Yageo, Max Operating Temperature=155°C, Max Power Dissipation=63mW, Min Operating Temperature=-55°C, Power Rating=62.5mW, Resistance Tolerance=1%, Resistor Type="Thick Film", Supplier Part Number=YAG3086CT-ND, Temperature Coefficient=100ppm/°C, Voltage Rating=50V, Case/Package=0402, Category="Chip SMD Resistors", ComponentLink1Description=https://datasheet.ciiva.com/11808/0900766b80c66297-11808450.pdf?src-supplier=Rs, ComponentLink1URL=https://datasheet.ciiva.com/11808/0900766b80c66297-11808450.pdf?src-supplier=Rs, ComponentLink2Description=https://datasheet.ciiva.com/17044/pyu-rc0402-51-rohs-l-6-17044345.pdf?src-supplier=Future+Electronics, ComponentLink2URL=https://datasheet.ciiva.com/17044/pyu-rc0402-51-rohs-l-6-17044345.pdf?src-supplier=Future+Electronics, ComponentLink3Description=https://datasheet.ciiva.com/7849/1018594-7849927.pdf?src-supplier=Element14, ComponentLink3URL=https://datasheet.ciiva.com/7849/1018594-7849927.pdf?src-supplier=Element14, ComponentLink4Description=https://datasheet.ciiva.com/7849/1018594-7849926.pdf?src-supplier=Element14, ComponentLink4URL=https://datasheet.ciiva.com/7849/1018594-7849926.pdf?src-supplier=Element14, Construction=Rectangular, Depth=0.5mm, Features="Moisture Resistant", Height=0.016inch, Lead Free="Lead Free", Length=1mm, Manufacturer Part Number=RC0402FR-0727RL, Military Standard=Not, Number of Terminations=2, Packaging="Tape and Reel", Pricing="1=0.1, 10=0.007, 100=0.0056, 1000=0.00408, 2500=0.00357 (USD)", Reach SVHC Compliant=Unknown, RoHS=Yes, RoHS Compliant=Yes, Series=RC, Stock=352788, Supplier=Digikey, Technology="THICK FILM", Termination=SMD/SMT, Tolerance=1%, Voltage Rating (AC)=50V, Weight=2.3E-05oz, Width=0.5mm
R5 R6 R14 R15: library part RC0402FR-075K1L, "RES 5.1K OHM 1% 1/16W 0402", Case Code (Imperial)=0402, Case Code (Metric)=1005, Manufacturer=Yageo, Max Operating Temperature=155°C, Max Power Dissipation=63mW, Min Operating Temperature=-55°C, Package Quantity=1, Resistance Tolerance=1%, Resistor Type="Thick Film", Supplier Part Number=311-5.10KLRCT-ND, Temperature Coefficient=100ppm/°C, Voltage Rating=50V, Case/Package=0402, Category="Chip SMD Resistors", Construction=Rectangular, Depth=0.5mm, Features="Moisture Resistant", Height=0.016inch, Lead Free=5697LeadFree, Length=1mm, Manufacturer Part Number=RC0402FR-075K1L, Military Standard=Not, Number of Terminations=2, Packaging="Tape and Reel", Parameter 1=C105872, Power Rating=63mW, Pricing="1=0.1, 10=0.008, 100=0.0066, 1000=0.0051, 2500=0.00459, 5000=0.00408 (USD)", Reach SVHC Compliant=Unknown, RoHS=Yes, RoHS Compliant=Yes, Series=RC, Stock=229144, Supplier=Digikey, Technology="THICK FILM", Termination=SMD/SMT, Tolerance=1%, Voltage Rating (DC)=50V, Width=0.02inch, Working Voltage=50V
R9 R11 R13 R16 R18 R25: library part AC0402FR-0710KL, "SMD Chip Resistor, 10 kOhm, ï¿½ 1%, 62.5 mW, 0402 [1005 Metric], Thick Film, General Purpose", Case Code (Imperial)=0402, Case Code (Metric)=1005, LCSC part number=C144807, Manufacturer=Yageo, Max Operating Temperature=155°C, Max Power Dissipation=63mW, Min Operating Temperature=-55°C, Power Rating=62.5mW, Supplier Part Number=YAG3436CT-ND, Temperature Coefficient=100ppm/°C, Tolerance=1%, Voltage Rating=50V, Case/Package=0402, Category="Chip SMD Resistors", ComponentLink1Description=https://datasheet.ciiva.com/12656/pyu-ac-51-rohs-l-2-12656634.pdf?src-supplier=Mouser, ComponentLink1URL=https://datasheet.ciiva.com/12656/pyu-ac-51-rohs-l-2-12656634.pdf?src-supplier=Mouser, Features="Moisture Resistant,Automotive AEC-Q200", Height=0.015inch, Lead Free="Lead Free", Length=0.039inch, Manufacturer Part Number=AC0402FR-0710KL, Number of Terminations=2, Packaging="Tape and Reel", Pricing="1=0.1, 10=0.009, 100=0.0082, 1000=0.00714, 2500=0.00612, 5000=0.0051 (USD)", RoHS=Yes, RoHS Compliant=Yes, Series=AC, Stock=801477, Supplier=Digikey, Termination=SMD/SMT, Width=0.02inch
R10: library part RC0402JR-074K7L, "RES 4.7K OHM 5% 1/16W 0402", Case Code (Imperial)=0402, Case Code (Metric)=1005, LCSC part number=C105870, Manufacturer=Yageo, Max Operating Temperature=155°C, Max Power Dissipation=63mW, Min Operating Temperature=-55°C, Package Quantity=1, Power Rating=62.5mW, Resistance Tolerance=5%, Resistor Type="Thick Film", Supplier Part Number=311-4.7KJRCT-ND, Temperature Coefficient=100ppm/°C, Voltage Rating=50V, Case/Package=0402, Category="Chip SMD Resistors", Features="Moisture Resistant", Height=0.016inch, Lead Free="Lead Free", Length=0.039inch, Manufacturer Part Number=RC0402JR-074K7L, Number of Terminations=2, Packaging="Tape and Reel", Pricing="1=0.1, 10=0.007, 50=0.0056, 100=0.0041, 500=0.00356, 1000=0.0025 (USD)", Reach SVHC Compliant=No, RoHS=Yes, RoHS Compliant=Yes, Series=RC, Stock=17282127, Supplier=Digikey, Termination=SMD/SMT, Tolerance=5%, Voltage Rating (AC)=50V, Width=0.02inch
R19 R20: library part RC0402JR-071KL, "RES 1K OHM 5% 1/16W 0402", Case Code (Imperial)=0402, Case Code (Metric)=1005, LCSC part number=C105637, Manufacturer=Yageo, Max Operating Temperature=155°C, Max Power Dissipation=63mW, Min Operating Temperature=-55°C, Package Quantity=1, Power Rating=62.5mW, Resistance Tolerance=5%, Resistor Type="Thick Film", Supplier Part Number=311-1.0KJRCT-ND, Temperature Coefficient=100ppm/°C, Voltage Rating=50V, Case/Package=0402, Category="Chip SMD Resistors", Features="Moisture Resistant", Height=0.016inch, Lead Free=5697LeadFree, Length=0.039inch, Manufacturer Part Number=RC0402JR-071KL, Number of Terminations=2, Packaging="Cut Tape", Pricing="1=0.1, 10=0.008, 50=0.0072, 100=0.0061, 500=0.0056, 1000=0.0051, 5000=0.00408 (USD)", Reach SVHC Compliant=No, RoHS=Yes, RoHS Compliant=Yes, Series=RC, Stock=11901828, Supplier=Digikey, Termination=SMD/SMT, Tolerance=5%, Voltage Rating (AC)=50V, Width=0.02inch
SW1 SW2: library part PTS645SH50SMTR92LFS, "6mm 5mm Round Button 50mA Standing paste 6mm SPST 200gf 12V SMD,6x6mm Tactile Switches ROHS", Contact Current Rating=50mA, Contact Resistance=100mR, LCSC part number=C221869, Manufacturer="ITT C&K", Supplier Part Number=CKN9085CT-ND, Category="Tactile Switches", ComponentLink1Description=https://datasheet.ciiva.com/29903/getdatasheetpartid-773702-29903807.pdf?src-supplier=Verical, ComponentLink1URL=https://datasheet.ciiva.com/29903/getdatasheetpartid-773702-29903807.pdf?src-supplier=Verical, ComponentLink2Description=https://datasheet.ciiva.com/14920/pts645-14920741.pdf?src-supplier=Digikey, ComponentLink2URL=https://datasheet.ciiva.com/14920/pts645-14920741.pdf?src-supplier=Digikey, ComponentLink3Description=https://datasheet.ciiva.com/22637/1707731-22637356.pdf?src-supplier=Element14, ComponentLink3URL=https://datasheet.ciiva.com/22637/1707731-22637356.pdf?src-supplier=Element14, Lead Free=5697LeadFree, Manufacturer Part Number=PTS645SH50SMTR92LFS, Number of Positions=2NUMBER, Pricing="1=0.4, 10=0.325, 25=0.2992, 100=0.2639, 250=0.24264, 500=0.22758 (USD)", RoHS=Yes, Stock=26399, Supplier=Digikey
U1: "SMD module, ESP32-S3FN8, 8 MB SPI flash, PCB antenna", LCSC part number=C2913206, Manufacturer="Espressif Systems", Supplier Part Number=1965-ESP32-S3-MINI-1-N8CT-ND, Category=LDO, ComponentLink1Description=https://datasheet.octopart.com/ESP32-S3-MINI-1-N8-Espressif-Systems-datasheet-165560562.pdf?src-supplier=TME, ComponentLink1URL=https://datasheet.octopart.com/ESP32-S3-MINI-1-N8-Espressif-Systems-datasheet-165560562.pdf?src-supplier=TME, Manufacturer Part Number=ESP32-S3-MINI-1-N8, Pricing="1=3.1 (USD)", RoHS=No, Stock=3722, Supplier=Digikey
U2: library part FT231XQ-R, "USB to Full Handshake UART Interface QFN20 Reel (not offered in your region)", LCSC part number=C132159, Manufacturer=FTDI, Supplier Part Number=768-1128-1-ND, Category="Interface ICs", ComponentLink1Description=https://datasheet.ciiva.com/4787/ds-ft231x-13571-4787570.pdf?src-supplier=Mouser, ComponentLink1URL=https://datasheet.ciiva.com/4787/ds-ft231x-13571-4787570.pdf?src-supplier=Mouser, ComponentLink2Description=https://datasheet.ciiva.com/30475/0900766b811020d3-30475405.pdf?src-supplier=Rs, ComponentLink2URL=https://datasheet.ciiva.com/30475/0900766b811020d3-30475405.pdf?src-supplier=Rs, ComponentLink3Description=https://datasheet.ciiva.com/1787/ds-ft231x-1787312.pdf?src-supplier=Digikey, ComponentLink3URL=https://datasheet.ciiva.com/1787/ds-ft231x-1787312.pdf?src-supplier=Digikey, ComponentLink4Description=https://datasheet.ciiva.com/1787/ft-x-series-1787313.pdf?src-supplier=Digikey, ComponentLink4URL=https://datasheet.ciiva.com/1787/ft-x-series-1787313.pdf?src-supplier=Digikey, ComponentLink5Description=https://datasheet.ciiva.com/1787/ft-x-series-1787314.pdf?src-supplier=Digikey, ComponentLink5URL=https://datasheet.ciiva.com/1787/ft-x-series-1787314.pdf?src-supplier=Digikey, Height=800um, Lead Free=5697LeadFree, Manufacturer Part Number=FT231XQ-R, Pricing="1=2.34, 25=2.27, 100=2.2, 250=2, 500=1.82002, 1000=1.7625 (USD)", RoHS=Yes, Stock=45518, Supplier=Digikey
U3: library part TL1963A-33DCYR, "IC REG LINEAR 3.3V 1.5A SOT223-4", LCSC part number=C181262, Manufacturer="Texas Instruments", Supplier Part Number=296-24897-1-ND, Category="Voltage Regulators - Linear", ComponentLink1Description=https://datasheet.ciiva.com/2046/-2046068.pdf?src-supplier=Digikey, ComponentLink1URL=https://datasheet.ciiva.com/2046/-2046068.pdf?src-supplier=Digikey, Lead Free=5697LeadFree, Manufacturer Part Number=TL1963A-33DCYR, Pricing="1=2.77, 10=2.069, 25=1.8936, 100=1.7, 250=1.60772, 500=1.55212, 1000=1.50634 (USD)", RoHS=Yes, Stock=6096, Supplier=Digikey, Thickness=1.6mm

## Via types
v1: diameter 24, hole 12, Layer 1 to Layer 4, tented both sides, 164 vias
v2: diameter 28, hole 14, Layer 1 to Layer 4, tented both sides, 3 vias

## Nets (pads, with @x,y where several pads share a name; then routed paths per layer and width w, separated by ;. In a path a pad name is that pad's centre, name@x,y a point inside that pad or via, vN(x,y) a via of type N, cw(c..) or ccw(c..) an arc to the next point about the centre after c; other vN are vias at no path point)
+3V3: C4.2 C13.2 C14.2 J1.1 J6.1 R2.1 R3.1 R18.2 R25.2 U1.3 | length 3277.7
  Layer 1 w15: C13.2@2370.16,858.13 C14.2@2401,858.13 ; v1(2373.13,831.13) C13.2@2373.13,857
  Layer 1 w20: R3.1@543,577.27 543,537 v1(544,536) ; R2.1@700.73,562 700.87,561.87 700.87,523.13 v1(701,523) ; R18.2@1585,366.73 1585,365.91 1585.83,365.08 1604.11,365.08 1623.7,345.49 v1(1624.51,345.49) ; R25.2@1585,698.27 1610.06,698.27 1621.37,686.95 1621.37,683.81 v1(1623.09,682.09) ; v1(2373.13,831.13) 2373.59,830.66 2373.59,795.31 U1.3@2374.05,794.85 ; v1(2423,858) 2423.77,857.23 2464.85,857.23 2464.95,857.13 C4.2@2473,857.13
  Layer 2 w30: v1(544,536) 558,522 v1@690.6,522 ; v1(701,523) 785,607 785,625 1023,863 1676,863 ; J6.1@1410,520 1544,520 ; 1547,423 1547,562.37 1580,595.37 1580,639 v1(1623.09,682.09) 1700,759 1700,863 ; 1549.12,420.88 1555.69,414.31 v1(1624.51,345.49) ; 1675,862 1676,863 ; 2277.42,863 1700,863 ; 2279.42,863 2398.28,863 2402.52,858.77 v1@2422.23,858.77 ; 2372,861 2372,853.13 2372.36,852.77 2372.36,831.89 v1(2373.13,831.13) ; v1(2423,858) 2480,915 2480,949.68 2479.2,950.47 2479.2,967.25 J1.1@2462.2,984.25 ; 1676,863 1700,863
"+3V3 FIDI": C6.2 C8.2 R3.2 R8.1 U2.10 U2.20 | length 873.6
  Layer 1 w6: 575,735.72 579.91,740.63 U2.10@604.59,740.63 ; U2.20@755.41,819.37 778.07,819.37
  Layer 1 w13.82: 778.07,819.37 797.5,819.37 C8.2@804.13,826
  Layer 1 w13.84: C8.2@804.13,826 C8.2@804.63,826.5
  Layer 1 w15: R3.2@543,610.73 543,611.72 520,634.72 v1(520,635) 520,637.44 504.44,652.99 504.44,687.44 518,701 542.1,701 542.1,702.81 575,735.72 ; v1(589,912) 783,912 805.02,889.98 C6.2@805.02,862.34 ; C8.2@804.63,826.5 804.63,859.5 C6.2@805.13,860
  Layer 4 w20: v1(520,635) 543,635 589,681 v1(589,912)
+3V3_REG: C10.2 C11.2 J6.2 R19.2 R20.2 U3.3 | length 2267
  Layer 1 w15: 527.16,315.73 527.16,282.51 534.34,275.34 551.53,258.15 551.53,250.34 C11.2@553.87,248 ; v1(536,327) 536.56,326.44 579.44,326.44 C10.2@580,325.87 ; v1(585,248) 586.72,246.28 586.72,226.51 593.79,219.45 U3.3@641.97,219.45 ; v1(1647,250) 1655,258 R20.2@1655,283.27
  Layer 1 w20: v1@1629,765 1629.08,765.08 1654.17,765.08 1655,765.91 R19.2@1655,766.73
  Layer 2 w40: v1(536,327) 538.51,329.51 575.57,329.51 599,306.08 599,262 v1(585,248) 1078,248 1182.7,352.7 1182.7,451.7 1246.41,515.41 1305.41,515.41 J6.2@1310,520 ; v1(1619,766) 1585,732 1390,732 1310,652 J6.2@1310,520 ; v1(1647,250) 1511,386 1394,386 1348,432 1348,482 J6.2@1310,520
+5V: C5.2 C12.2 J1.21 J5.2 R1.1 R10.2 U3.1 | length 1416.4
  Layer 1 w20: J5.2@423,537 505,455 505,425 536.13,393.87 635.29,393.87 U3.1@641.97,400.55 ; J1.21@462.2,984.25 470.62,975.83 493.91,975.83 531.87,937.87 C5.2@531.87,910 531.75,909.88 v1(531.75,876.91) ; R1.1@622,562 622.83,562 623.65,561.17 623.65,503.31 641.97,485 U3.1@641.97,400.55 ; R10.2@850.73,656 851.72,656 852.54,655.17 852.54,653.91 863,643.46 863,538 725.55,400.55 U3.1@641.97,400.55
  Layer 4 w20: J5.2@425,525 477,577 477,653 531.75,707.75 v1(531.75,876.91)
"+5V BUS1": C1.2 D1.2 J3.A4B9 J3.B4A9 J5.1 | length 707.1
  Layer 1 w15: J3.B4A9@247.64,735.43 288.46,735.43 327.4,696.5 353.5,696.5 J5.1@425,625 ; 312,932.54 D1.2@347,932.54 ; D1.2@347.84,935.54 348.63,934.75 393.38,934.75 C1.2@415.13,913
  Layer 1 w20: J3.B4A9@247.64,735.43 192.72,735.43 181,747.15 181,906 199.41,924.41 J3.A4B9@247.64,924.41 301.41,924.41 309.54,932.54 312,932.54
"+5V BUS2": C9.2 D4.2 J4.A4B9 J4.B4A9 J5.3 | length 597.1
  Layer 1 w6: 320.36,334.65 330,344.29 D4.2@330,353.46 358,353.46 367,344.46
  Layer 1 w12: J5.3@425,425 426.97,423.03 426.97,378.03 440.13,364.87 C9.2@440.13,344.46
  Layer 1 w15: 367,344.46 432.66,344.46
  Layer 1 w20: J4.B4A9@247.64,125.59 208.41,125.59 190.36,143.64 171,163 171,280 190.36,299.36 205.57,314.57 300.28,314.57 320.36,334.65
"+VCC FIDI": C2.2 C3.2 R1.2 R2.2 U2.12 | length 143.2
  Layer 1 w6: 659.13,677.07 659.13,703.4 U2.12@660.32,704.59
  Layer 1 w12.08: C3.2@659.13,652 659.13,677.07
  Layer 1 w15: R1.2@655.46,562 658.13,564.66 C2.2@658.13,605 658.13,610 658.13,620 ; 659.13,621 C3.2@659.13,652
BTN_GPIO0: C16.2 R17.2 R24.1 R25.1 SW2.3 SW2.4 | length 1516.9
  Layer 1 w6: R17.2@940,748.27 971.27,748.27 v1@972,749 ; v1(1183,729) 1183,725.21 1200,708.21 1200,662.91 SW2.3@1198.5,661.42 1503.91,661.42 1511.5,669 1511.5,707.5 1535.73,731.73 R25.1@1585,731.73 C16.2@1585,783.13 1593.9,792.03 1598.17,792.03 1600.52,794.37 1683.73,794.37 1772.36,883 2246.27,883 R24.1@2250,886.73
  Layer 4 w6: v1(979,748) 1065,748 1072,741 1171,741 v1(1183,729)
CHIP_PU: C15.2 J2.2 R12.2 R18.1 SW1.3 SW1.4 U1.45 | length 3449.8
  Layer 1 w6: J2.2@2360.63,68.9 2440.98,149.25 U1.45@2440.98,243.67
  Layer 1 w10.01: R12.2@940,568.27 1011.93,568.27 v1(1013,569.34) 1170.66,569.34 1270,470 1270,330 1198.5,258.5 SW1.3@1198.5,211.42 SW1.4@1511.5,211.42 1579.14,211.42 1585,217.28 C15.2@1585,248.13 1562.87,248.13 1551,260 1551,325 1559.27,333.27 R18.1@1585,333.27
  Layer 4 w6: v1(1013,569.34) 1042.66,599 1461,599 1495,565 1801.82,565 1886.82,650 2350,650 2405,595 2405,192 2360.63,147.63 J2.2@2360.63,68.9
CON1_USB_N: D2.2 J3.A7 J3.B7 R4.1 | length 422.9
  Layer 1 w6.03: J3.A7@247.64,820.08 264.37,820.08 269.98,814.46 D2.2@343,814.46 354,814.46 368.02,800.45 v1(368.02,798.57) ; J3.B7@247.64,859.45 248.43,858.68 275.67,858.68 286.9,847.45 286.9,818.1 ; v1(446,754) 448.53,754 458.52,763.98 475.3,763.98 R4.1@485.28,754 ; R4.1@481.51,757.78 R4.1@485.28,754 ; R4.1@482,758.27 R4.1@486.27,754 R4.1@485.28,754
  Layer 4 w6.03: v1(368.02,798.57) 364.58,802.01 354.15,802.01 350.42,805.74 350.42,810.73 359.3,819.62 376.74,819.62 387.33,809.02 387.33,797.06 420.41,763.98 433.48,763.98 443.47,754 v1(446,754)
CON1_USB_P: D3.2 J3.A6 J3.B6 R7.1 | length 448.8
  Layer 1 w6.03: J3.A6@247.64,839.76 247.3,839.42 215.96,839.42 209,832.47 209,806 214.61,800.39 J3.B6@247.64,800.39 J3.B6@247.64,800.39 307.94,800.43 313.93,794.45 v1(318.79,794.45) ; v1@318.79,796.21 332.46,782.54 D3.2@343,782.54 ; v1(446,788) 448.53,788 458.52,778.02 472.44,778.02 477.47,783.05 477.47,783.19 485.28,791 R7.1@486.27,791
  Layer 4 w6.03: v1(318.79,794.45) 322.23,797.89 332.66,797.89 336.39,801.62 336.39,816.55 353.49,833.65 382.55,833.65 401.36,814.83 401.36,802.88 426.22,778.02 433.48,778.02 443.47,788 v1(446,788)
CON2_USB_N: D6.2 J4.A7 J4.B7 R26.1 | length 1782.1
  Layer 1 w6.03: J4.A7@247.64,210.24 208.76,210.24 201,218 201,243.47 207.14,249.61 J4.B7@247.64,249.61 288.39,249.61 310,228 334.09,228 336,226.09 336,224.3 337.91,222.39 340.07,222.39 346.43,216.03 404.48,216.03 417.45,229 v2(419,229) ; v1(1629,519) 1631.74,519 1641.52,509.22 1691.2,509.22 1694.74,512.75 1694.74,536.47 R26.1@1698.27,540
  Layer 4 w6.03: v2(419,229) 421.53,229 433.52,217.02 504.62,217.02 595,307.39 595,350.15 710.85,466 1448.16,466 1490.67,508.52 1561.04,508.52 1562.04,507.52 1616.48,507.52 1627.97,519 v1(1629,519)